# EAGLE board Esp_4relay_feedback (EAGLE 6.1)
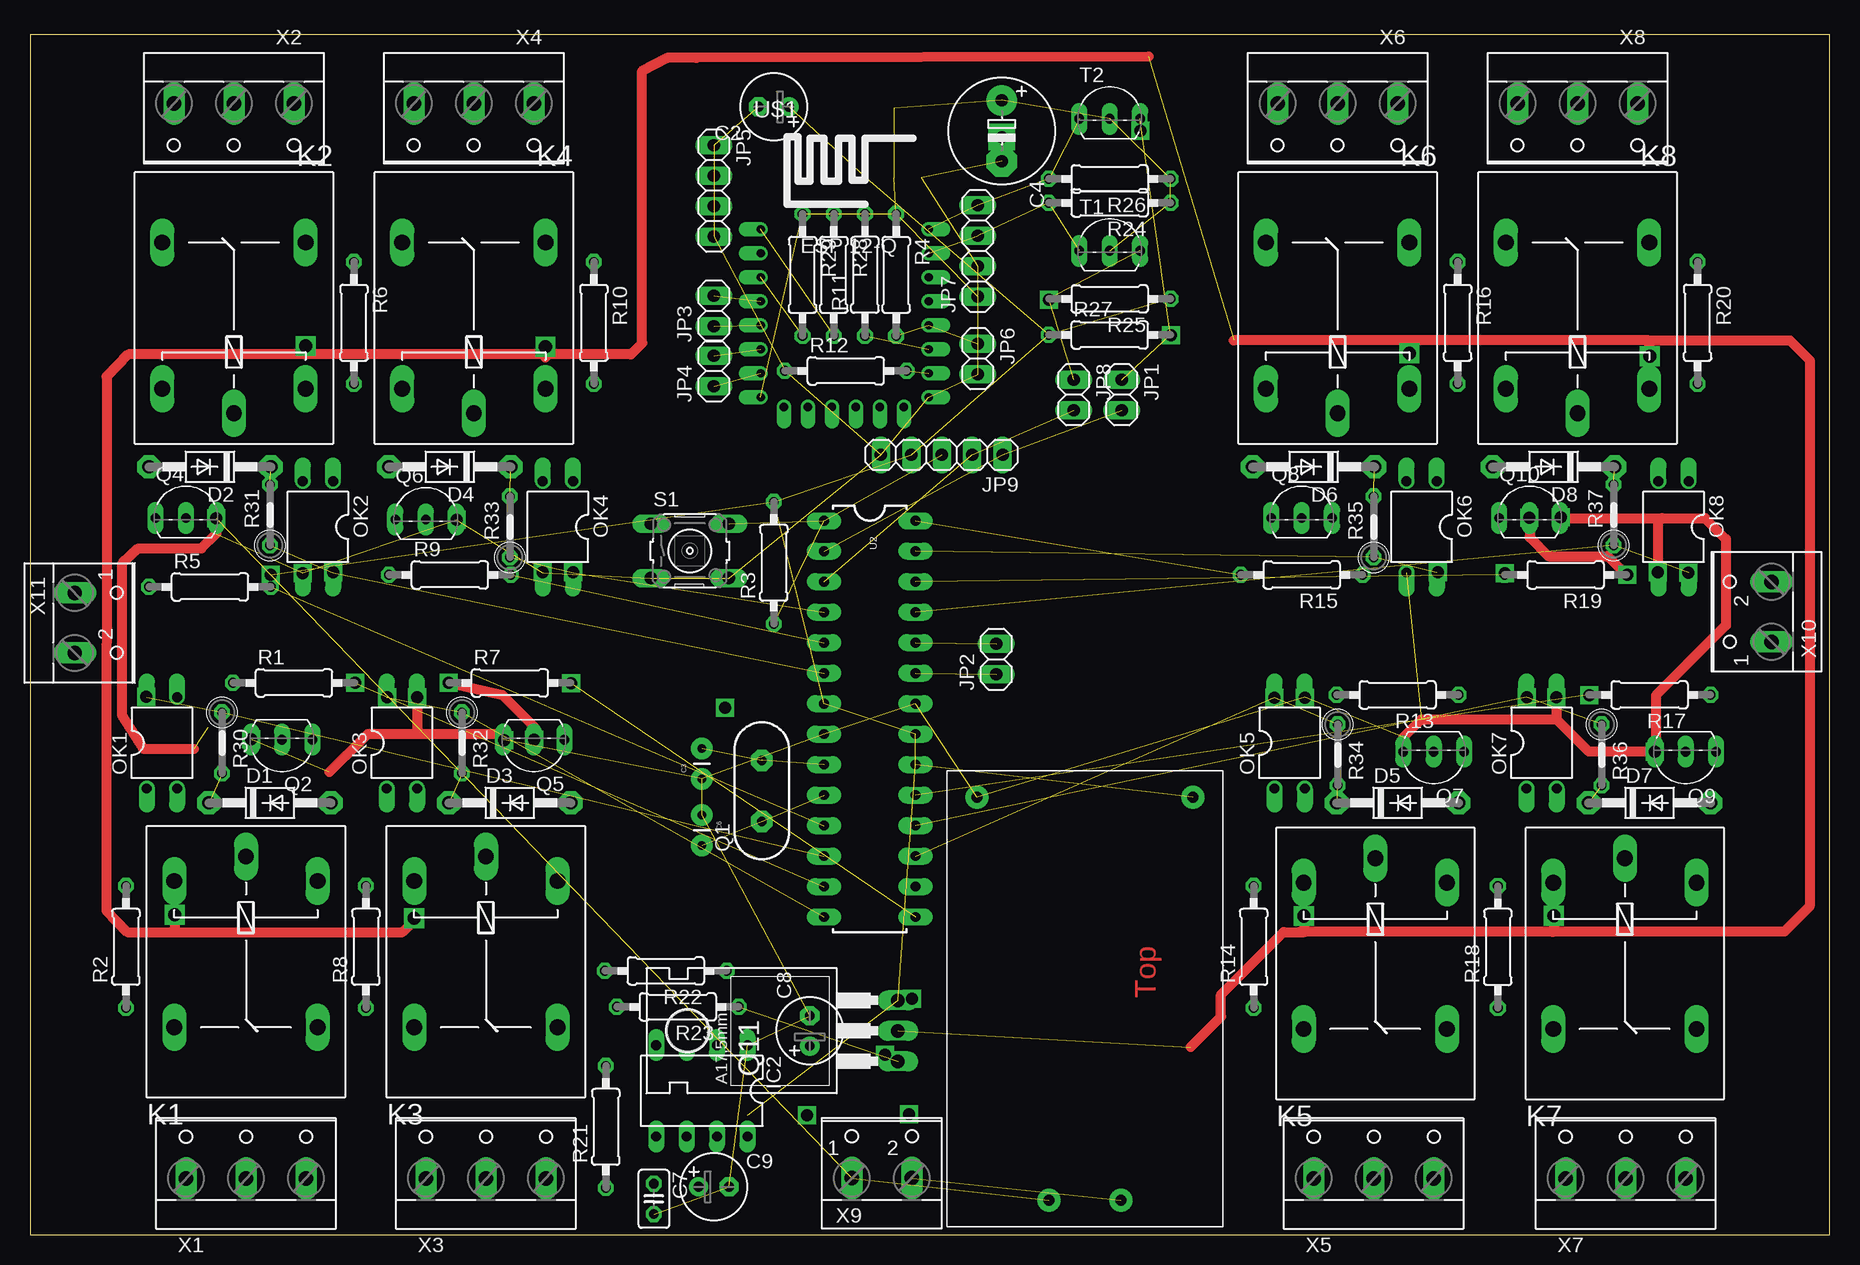
[diagram p0: board, top side]
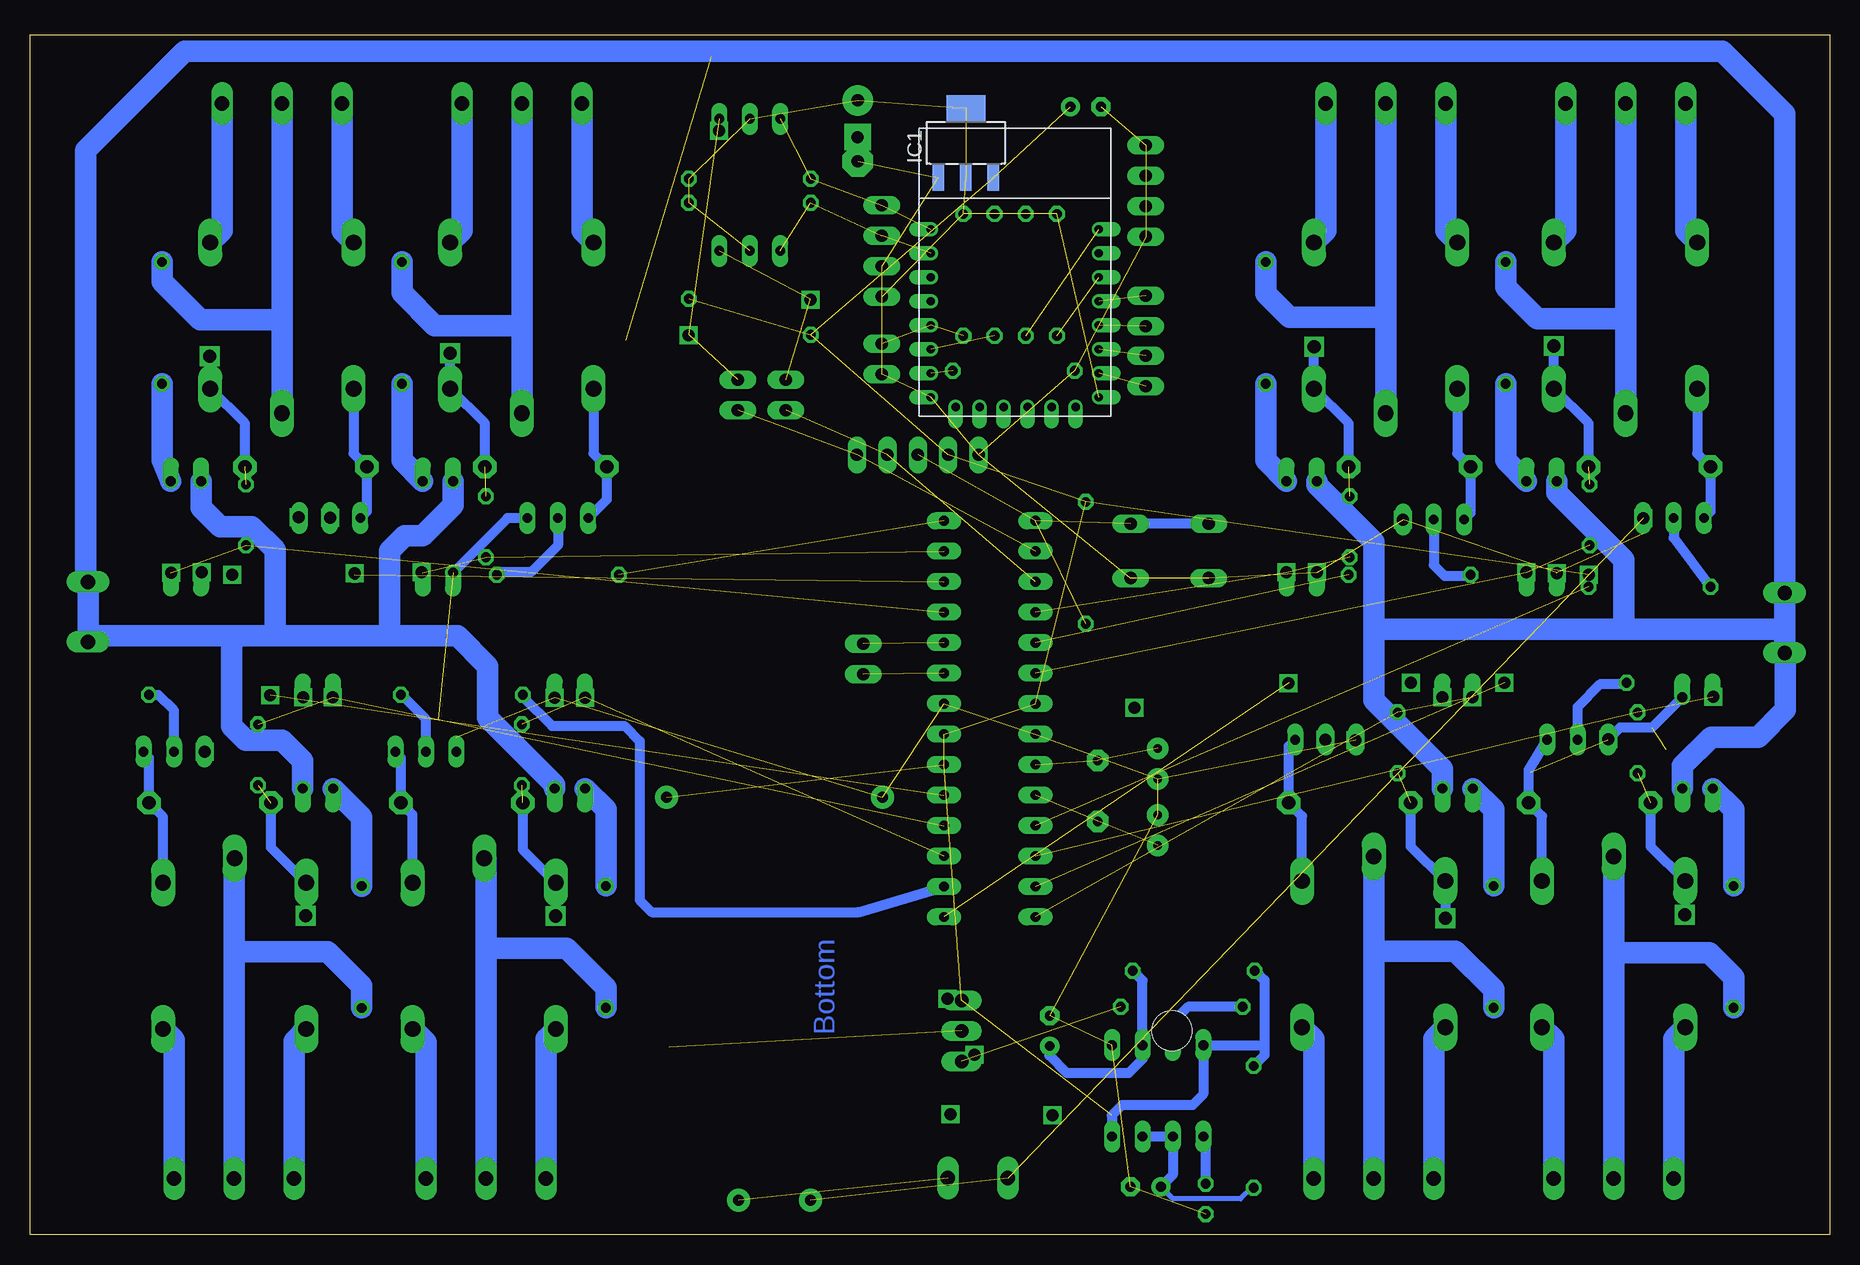
[diagram p1: board, bottom side, seen from below]

Size 150 x 100 mm. Coordinates in mm from the lower left corner, seen from the top.
Outline: 0,0 150,0 150,100 0,100 0,0
Copper layers (1*16): Top 0.035mm / dielectric 1.5mm / Bottom 0.035mm
Design rules: minimum track width 30mil, minimum drill 24mil, track to track 18mil, track to pad 18mil, pad to pad 18mil, via to via 18mil, smd to smd 8mil, copper to edge 20mil, drill to drill 15mil, minimum pad ring 10mil, minimum via ring 8mil, stop-mask expansion 4mil, vias tented up to drill 0mil, thermal gap 10mil

## Footprints (pad centres in the part's own frame; a part is rotated, then mirrored left to right if it is on the bottom)
E2,5-6 = drill 0.813 pad 1.6: + -1.27,0 | drill 0.813 pad 1.6 octagon: - 1.27,0
CAP-PTH-SMALL = drill 0.7 pad 1.778: 1 0,0; 2 2.54,0
E5-8,5 = drill 1.016 pad 2.54: + -2.54,0 | drill 1.016 pad 2.54 octagon: - 2.54,0
C025-025X050 = drill 0.813 octagon: 1 -1.27,0; 2 1.27,0
DO41-10 = drill 1.1 pad 1.93 octagon: A 5.08,0; C -5.08,0
SOT223 = smd 0.95 x 2.15: 1 -2.3,-2.9; 2 0,-2.9; 3 2.3,-2.9 | smd 3.25 x 2.15: 4 0,2.9
DIL-08 = drill 0.813 long: 1 -3.81,-3.81; 2 -1.27,-3.81; 3 1.27,-3.81; 4 3.81,-3.81; 5 3.81,3.81; 6 1.27,3.81; 7 -1.27,3.81; 8 -3.81,3.81
1X02 = drill 1.016 long: 1 -1.27,0; 2 1.27,0
1X04 = drill 1.016 long: 1 -3.81,0; 2 -1.27,0; 3 1.27,0; 4 3.81,0
1X05 = drill 1.016 long: 1 -5.08,0; 2 -2.54,0; 3 0,0; 4 2.54,0; 5 5.08,0
G5LE = drill 1.321 long: 1 -7.493,-5.969; 2 -7.493,5.969; O 4.699,5.969; P -9.525,0; S 4.699,-5.969
DIL04 = drill 0.813 offset: 1 -1.27,-3.81; 2 1.27,-3.81; 3 1.27,3.81; 4 -1.27,3.81
HC49US = drill 0.8 pad 1.778 octagon: 1 -2.54,0; 2 2.54,0
TO92-EBC = drill 0.813 long: B 0,-1.27; C -2.54,-1.27; E 2.54,-1.27
TO220AH = drill 1.118 long: B -2.54,-6.35; C 0,-6.35; E 2.54,-6.35 | hole 3.302: 0,11.176
0207/10 = drill 0.813 octagon: 1 -5.08,0; 2 5.08,0
0207/5V = drill 0.813 octagon: 1 -2.54,0; 2 2.54,0
B3F-10XX = drill 1.016 long: 1 -3.251,2.261; 2 3.251,2.261; 3 -3.251,-2.261; 4 3.251,-2.261
TO92-CBE = drill 0.813 long: B 0,0; C -2.54,0; E 2.54,0
DIL28-3 = drill 0.813 pad 1.422 long: 1 -16.51,-3.81; 2 -13.97,-3.81; 3 -11.43,-3.81; 4 -8.89,-3.81; 5 -6.35,-3.81; 6 -3.81,-3.81; 7 -1.27,-3.81; 8 1.27,-3.81; 9 3.81,-3.81; 10 6.35,-3.81; 11 8.89,-3.81; 12 11.43,-3.81; 13 13.97,-3.81; 14 16.51,-3.81; 15 16.51,3.81; 16 13.97,3.81; 17 11.43,3.81; 18 8.89,3.81; 19 6.35,3.81; 20 3.81,3.81; 21 1.27,3.81; 22 -1.27,3.81; 23 -3.81,3.81; 24 -6.35,3.81; 25 -8.89,3.81; 26 -11.43,3.81; 27 -13.97,3.81; 28 -16.51,3.81
ESP12Q = drill 0.7 offset: ADC -7.1,3.8; CH_PD -7.1,1.8; CS0 -5.165,-9.005; GND 6.9,-8.2; GPIO0 6.9,-2.2; GPIO2 6.9,-4.2; GPIO4 6.9,1.8; GPIO5 6.9,-0.2; GPIO9 -1.165,-9.005; GPIO10 0.835,-9.005; GPIO12 -7.1,-4.2; GPIO13 -7.1,-6.2; GPIO14 -7.1,-2.2; GPIO15 6.9,-6.2; GPIO16 -7.1,-0.2; MISO -3.165,-9.005; MOSI 2.835,-9.005; RESET -7.1,5.8; RX 6.9,3.8; SCLK 4.835,-9.005; TX 6.9,5.8; VCC -7.1,-8.2
AMIT_HIGH_LINK = drill 0.9 pad 1.93: AC1 -18.12,3.07; AC2 -18.12,-2.93; GND 15.48,9.07; VCC 15.48,-8.93
W237-103 = drill 1.194 long: 1 -5,-1.29; 2 0,-1.29; 3 5,-1.29
W237-102 = drill 1.194 long: 1 -2.5,-1.27; 2 2.5,-1.27

## Placement (x,y rotation side)
C2  10uF  [E2,5-6]  62,94 180 top
C3  22pF  [CAP-PTH-SMALL]  56,38 90 top
C4  470uF  [E5-8,5]  81,92 270 top
C6  22pF  [CAP-PTH-SMALL]  56,35 270 top
C7  0.01uf  [C025-025X050]  52,3 270 top
C8  10uf  [E2,5-6]  65,17 90 top
C9  100uf  [E2,5-6]  57,4 0 top
D1  1N4007  [DO41-10]  20,36 0 top
D2  1N4007  [DO41-10]  15,64 180 top
D3  1N4007  [DO41-10]  40,36 0 top
D4  1N4007  [DO41-10]  35,64 180 top
D5  1N4007  [DO41-10]  114,36 0 top
D6  1N4007  [DO41-10]  107,64 180 top
D7  1N4007  [DO41-10]  135,36 0 top
D8  1N4007  [DO41-10]  127,64 180 top
IC1  LM1117MP-3.3  [SOT223]  72,91 0 bottom
IC2  NE555  [DIL-08]  56,12 180 top
JP1  [1X02]  91,70 270 top
JP2  [1X02]  80.55,47.99 90 top
JP3  [1X02]  57,77 90 top
JP4  [1X02]  57,72 90 top
JP5  [1X04]  57,87 270 top
JP6  [1X02]  79,73 270 top
JP7  [1X04]  79,82 90 top
JP8  [1X02]  87,70 270 top
JP9  [1X05]  76,65 180 top
K1  G5LE  [G5LE]  18,22 270 top
K2  G5LE  [G5LE]  17,78 90 top
K3  G5LE  [G5LE]  38,22 270 top
K4  G5LE  [G5LE]  37,78 90 top
K5  G5LE  [G5LE]  112.14,21.86 270 top
K6  G5LE  [G5LE]  109,78 90 top
K7  G5LE  [G5LE]  132.95,21.86 270 top
K8  G5LE  [G5LE]  129,78 90 top
OK1  PC817  [DIL04]  11,41 0 top
OK2  PC817  [DIL04]  24,59 180 top
OK3  PC817  [DIL04]  31,41 0 top
OK4  PC817  [DIL04]  44,59 180 top
OK5  PC817  [DIL04]  105,41 0 top
OK6  PC817  [DIL04]  116,59 180 top
OK7  PC817  [DIL04]  126,41 0 top
OK8  PC817  [DIL04]  137,59 180 top
Q1  16MHz  [HC49US]  61,37 90 top
Q2  BC547  [TO92-EBC]  21,40 180 top
Q4  BC547  [TO92-EBC]  13,61 0 top
Q5  BC547  [TO92-EBC]  42,40 180 top
Q6  BC547  [TO92-EBC]  32.99,60.88 0 top
Q7  BC547  [TO92-EBC]  117,39 180 top
Q8  BC547  [TO92-EBC]  106,61 0 top
Q9  BC547  [TO92-EBC]  138,39 180 top
Q10  BC547  [TO92-EBC]  125,61 0 top
Q11  TIP120  [TO220AH]  66,17 90 top
R1  1k  [0207/10]  22,46 0 top
R2  220k  [0207/10]  8,24 90 top
R3  10k  [0207/10]  62,56 90 top
R4  10k  [0207/10]  72.2,80 270 top
R5  1k  [0207/10]  15,54 0 top
R6  220k  [0207/10]  27,76 270 top
R7  1k  [0207/10]  40,46 0 top
R8  220k  [0207/10]  28,24 90 top
R9  1k  [0207/10]  35,55 0 top
R10  220k  [0207/10]  47,76 270 top
R11  10k  [0207/10]  69.6,80 90 top
R12  10k  [0207/10]  68,72 0 top
R13  1k  [0207/10]  114,45 180 top
R14  220k  [0207/10]  102,24 90 top
R15  1k  [0207/10]  106,55 180 top
R16  220k  [0207/10]  119,76 270 top
R17  1k  [0207/10]  135,45 180 top
R18  220k  [0207/10]  122.35,23.99 90 top
R19  1k  [0207/10]  128,55 180 top
R20  220k  [0207/10]  139,76 270 top
R21  47k  [0207/10]  48,9 90 top
R22  1k  [0207/10]  53,22 180 top
R23  1k  [0207/10]  54,19 180 top
R24  10k  [0207/10]  90,86 180 top
R25  10k  [0207/10]  90,78 180 top
R26  10k  [0207/10]  90,88 180 top
R27  10k  [0207/10]  90,75 0 top
R28  10k  [0207/10]  67,80 270 top
R29  10k  [0207/10]  64.4,80 270 top
R30  10k  [0207/5V]  16,41 270 top
R31  10k  [0207/5V]  20,60 90 top
R32  10k  [0207/5V]  36,41 270 top
R33  10k  [0207/5V]  40,59 90 top
R34  10k  [0207/5V]  109,40 270 top
R35  10k  [0207/5V]  112,59 90 top
R36  10k  [0207/5V]  131,40 270 top
R37  10k  [0207/5V]  132,60 90 top
S1  [B3F-10XX]  55,57 0 top
T1  2N7000  [TO92-CBE]  90,82 0 top
T2  2N7000  [TO92-CBE]  90,93 0 top
U2  ATMEGA328P_PDIP  [DIL28-3]  70,43 270 top
U$1  ESP12Q  [ESP12Q]  68,78 0 top
U$2  AMIT_HIGH_LINK  [AMIT_HIGH_LINK]  88,21 90 top
X1  [W237-103]  18,6 0 top
X2  [W237-103]  17,93 180 top
X3  [W237-103]  38,6 0 top
X4  [W237-103]  37,93 180 top
X5  [W237-103]  112,6 0 top
X6  [W237-103]  109,93 180 top
X7  [W237-103]  133,6 0 top
X8  [W237-103]  129,93 180 top
X9  [W237-102]  71,6 0 top
X10  [W237-102]  143.89,51.92 90 top
X11  [W237-102]  5,51 270 top

## Library data of the parts
C2 C4 C7-C9 R1 R2 R4-R29 = rcl
C3 C6 Q1 = SparkFun
D1-D8 = diode
IC1 = lm1117_10; MF: Texas Instruments; MPN: LM1117MP-3.3; OC_FARNELL: 9778195; OC_NEWARK: 28X3416
IC2 = st-microelectronics; MF: Arrow Electronics; MPN: NE555N; OC_FARNELL: 1467742; OC_NEWARK: 89K1486
JP1-JP9 = pinhead
K1-K8 = relay; OC_FARNELL: unknown; OC_NEWARK: unknown
OK1-OK8 = optocoupler; MPN: PC817X4J000F; OC_FARNELL: 9707727; OC_NEWARK: 97K7059
Q2 Q4-Q10 = transistor-npn
Q11 = transistor-power
R3 = resistor
R30-R37 = amit_rcl
S1 = switch-omron; MPN: B3F-1000; OC_FARNELL: 176432; OC_NEWARK: 36M3542
T1 T2 = transistor
U2 = SparkFun-DigitalIC
U$1 = esp826612q
U$2 = amit_high_link_5W
X1-X8 = con-wago-500; MPN: 237-103; OC_FARNELL: unknown; OC_NEWARK: 18M7116
X9-X11 = amit_screw_terminal_23; MPN: 237-102; OC_FARNELL: unknown; OC_NEWARK: 70K9898

## Nets
3V3: C4.+ IC1.2 IC1.4 JP7.1 R4.1 R11.2 R24.1 R26.1 R28.1 R29.1 T1.B T2.B U$1.VCC
ERT: JP2.1 U2.23
F1: OK1.4 R30.1 U2.12
F2: OK2.4 R31.1 U2.6
F3: OK3.4 R32.1 U2.14
F4: OK4.4 R33.1 U2.4
F5: OK5.4 R34.1 U2.17
F6: OK6.4 R35.1 U2.27
F7: OK7.4 R36.1 U2.18
F8: OK8.4 R37.1 U2.25
GND: C2.- C3.1 C4.- C6.1 C7.2 C8.- C9.- IC1.1 IC2.1 JP5.1 JP5.2 JP5.3 JP5.4 JP6.2 JP7.2 JP9.5 OK1.3 OK2.3 OK3.3 OK4.3 OK5.3 OK6.3 OK7.3 OK8.3 Q2.E Q4.E Q5.E Q6.E Q7.E Q8.E Q9.E Q10.E R12.1 S1.3 S1.4 U2.8 U2.22 U$1.GND U$2.GND
IO0: JP6.1 R4.2 U$1.GPIO0
IO15: R12.2 U$1.GPIO15
LINE: OK1.2 OK2.2 OK3.2 OK4.2 OK5.2 OK6.2 OK7.2 OK8.2 X10.1 X10.2 X11.1 X11.2
N$1: K1.P R2.1 X1.2
N$2: OK1.1 R2.2
N$3: K1.S X1.1
N$4: K2.P R6.1 X2.2
N$5: C3.2 Q1.2 U2.9
N$6: K2.S X2.1
N$7: Q2.B R1.1
N$8: D1.A K1.2 Q2.C
N$9: Q4.B R5.1
N$10: C6.2 Q1.1 U2.10
N$11: D2.A K2.2 Q4.C
N$12: K2.O X2.3
N$13: OK2.1 R6.2
N$14: K3.P R8.1 X3.2
N$15: K3.S X3.1
N$16: Q5.B R7.1
N$17: D3.A K3.2 Q5.C
N$18: K3.O X3.3
N$19: OK3.1 R8.2
N$20: K4.P R10.1 X4.2
N$21: R11.1 U$1.GPIO2
N$22: K4.S X4.1
N$23: JP1.1 R27.2 T2.E
N$24: Q6.B R9.1
N$25: D4.A K4.2 Q6.C
N$26: C9.+ IC2.6 IC2.7 R21.1
N$27: JP8.1 R25.2 T1.E
N$28: K1.O X1.3
N$29: K4.O X4.3
N$30: OK4.1 R10.2
N$31: K5.P R14.1 X5.2
N$32: K5.S X5.1
N$33: Q7.B R13.1
N$34: D5.A K5.2 Q7.C
N$35: K5.O X5.3
N$36: C8.+ IC2.2 R22.1
N$37: C7.1 IC2.5
N$38: IC2.3 R23.2
N$39: Q11.B R23.1
N$40: R29.2 U$1.CH_PD
N$41: R28.2 U$1.RESET
N$42: OK5.1 R14.2
N$43: K6.P R16.1 X6.2
N$44: K6.S X6.1
N$45: Q8.B R15.1
N$46: D6.A K6.2 Q8.C
N$47: K6.O X6.3
N$48: OK6.1 R16.2
N$49: K7.P R18.1 X7.2
N$50: K7.S X7.1
N$51: Q9.B R17.1
N$52: D7.A K7.2 Q9.C
N$53: K7.O X7.3
N$54: OK7.1 R18.2
N$55: K8.P R20.1 X8.2
N$56: K8.S X8.1
N$57: Q10.B R19.1
N$58: D8.A K8.2 Q10.C
N$59: K8.O X8.3
N$60: OK8.1 R20.2
N$61: U$2.AC1 X9.1
N$62: JP3.1 U$1.GPIO14
N$63: JP3.2 U$1.GPIO16
N$64: JP4.1 U$1.GPIO13
N$65: JP4.2 U$1.GPIO12
N$66: U$2.AC2 X9.2
R1: R1.2 U2.13
R2: R5.2 U2.11
R3: R7.2 U2.15
R4: R9.2 U2.5
R5: R13.2 U2.16
R6: R15.2 U2.28
R7: R17.2 U2.19
R8: R19.2 U2.26
RELAY_SUPPLY: D1.C D2.C D3.C D4.C D5.C D6.C D7.C D8.C K1.1 K2.1 K3.1 K4.1 K5.1 K6.1 K7.1 K8.1 Q11.C R30.2 R31.2 R32.2 R33.2 R34.2 R35.2 R36.2 R37.2
RESET: JP9.3 R3.1 S1.1 S1.2 U2.1
RX: JP1.2 JP9.1 U2.2
RX1: JP7.3 R24.2 T1.C U$1.RX
TX: JP8.2 JP9.2 U2.3
TX1: JP7.4 R26.2 T2.C U$1.TX
VCC1: C2.+ IC1.3 IC2.4 IC2.8 JP9.4 Q11.E R3.2 R21.2 R22.2 R25.1 R27.1 U2.7 U2.20 U2.21 U$2.VCC
WE: JP2.2 U2.24

## Tracks (layer width: path | path; a pad name or v marks a point on that pad's centre or on a via)
3V3  (12 unrouted)
ERT  (1 unrouted)
F1  (2 unrouted)
F2  (2 unrouted)
F3  (2 unrouted)
F4  (2 unrouted)
F5  (2 unrouted)
F6  (2 unrouted)
F7  (2 unrouted)
F8  (2 unrouted)
GND  (via drill 1 pad 1.02)  (32 unrouted)
  Top 0.813: 127.29,42.93 129.95,40.27 Q9.E 135.52,40.33 135.52,44.96 141.36,50.8 141.36,57.99 139.62,59.73 136.03,59.73 | 127.29,42.93 127.29,44.79 OK7.3 | Q7.E 114.46,41.45 115.96,42.95 127.27,42.95 127.29,42.93 | Q10.E 136.03,59.73 | OK8.3 135.73,59.43 136.03,59.73 | 24.95,38.56 26.35,39.95 26.38,39.95 28.18,41.76 32.6,41.76 | Q4.E 15.55,59.74 15.68,59.74 15.53,59.59 15.53,58.45 14.29,57.2 9.03,57.2 7.71,55.96 7.71,43.26 9.49,40.49 13.65,40.49 | 32.6,41.76 38.97,41.76 Q5.E | OK3.3 32.27,42.09 32.6,41.76
  Bottom 0.813: OK1.3 14.81,42.27 17.46,42.27 Q2.E | Q8.E 110.19,59.73 OK6.3
  other vias: 32.27,44.81 22.72,55.14
IO0  (2 unrouted)
IO15  (1 unrouted)
LINE
  Bottom 1.778: OK5.2 106.27,37.53 111.85,43.1 111.85,47.4 114.36,49.91 119.98,49.91 | 119.98,49.91 129.7,49.91 | 129.7,49.91 133.34,49.91 | 133.34,49.91 144.79,49.91 | 144.79,49.91 144.84,49.91 144.94,50.01 | OK6.2 114.73,60.82 117.28,58.27 118.78,58.27 120.03,57.02 120.03,49.96 119.98,49.91 | OK8.2 135.73,60.61 134.15,59.03 131.51,59.03 129.58,57.1 129.58,50.04 129.7,49.91 | OK7.2 127.27,39.53 128.97,41.22 132.04,41.22 133.18,42.37 133.18,49.28 133.08,49.38 133.08,49.66 133.34,49.91 | OK4.2 42.73,62.53 37.96,57.76 37.96,50.22 | 37.96,50.22 37.96,44.55 32.27,38.86 OK3.2 | 16.88,50.47 4.33,50.47 4.28,50.42 3.81,50.42 3.73,50.34 | 16.88,50.47 37.71,50.47 37.96,50.22 | OK1.2 12.27,39.08 9.87,41.48 5.96,41.48 3.67,43.76 3.67,48.44 X11.2 3.73,50.34 | OK2.2 22.73,61.83 17.16,56.26 17.16,50.75 16.88,50.47 | 145.55,54.53 145.35,54.74 145.35,90.4 137.12,98.63 8.93,98.63 3.73,93.43 X11.1 3.73,50.34 | 145.55,54.53 145.15,54.53 145.16,54.52 X10.2 X10.1 145.16,49.54 144.79,49.91 | 145.55,54.53 145.76,54.33
N$1
  Bottom 1.778: K1.P 18,24.03 | 18,24.03 X1.2 | R2.1 8,21.46 10.04,23.5 17.47,23.5 18,24.03
N$2
  Bottom 1.778: R2.2 8,35.46 OK1.1
N$3
  Bottom 1.778: X1.1 13,16.33 K1.S
N$4
  Bottom 1.778: X2.2 17,76.71 | 17,76.71 K2.P | R6.1 27,78.96 24.36,76.33 17.38,76.33 17,76.71
N$5  (2 unrouted)
N$6
  Bottom 1.778: X2.1 22,83.67 K2.S
N$7
  Bottom 0.813: Q2.B 21,44 19.09,45.91 17.01,45.91 R1.1
N$8
  Bottom 0.813: K1.2 23.97,34.89 D1.A 25.08,38.73 Q2.C
N$9
  Bottom 0.813: Q4.B 13,58.08 R5.1
N$10  (2 unrouted)
N$11
  Bottom 0.813: K2.2 11.03,65.11 D2.A 9.92,60.27 Q4.C
N$12
  Bottom 1.778: X2.3 12,83.67 K2.O
N$13
  Bottom 1.778: R6.2 27,64.54 OK2.1
N$14
  Bottom 1.778: X3.2 38,23.88 | 38,23.88 K3.P | R8.1 28,20.45 31.17,23.62 37.75,23.62 38,23.88
N$15
  Bottom 1.778: X3.1 33,16.33 K3.S
N$16
  Top 0.813: R7.1 39.37,45 42,42.37 Q5.B
N$17
  Bottom 0.813: K3.2 43.97,34.89 D3.A 45.08,40.73 Q5.C
N$18
  Bottom 1.778: X3.3 43,16.33 K3.O
N$19
  Bottom 1.778: R8.2 28,35.46 OK3.1
N$20
  Bottom 1.778: X4.2 37,76.63 | 37,76.63 K4.P | R10.1 47,78.44 45.04,76.48 37.15,76.48 37,76.63
N$21  (1 unrouted)
N$22
  Bottom 1.778: X4.1 42,83.67 K4.S
N$23  (2 unrouted)
N$24
  Bottom 0.813: Q6.B 32.99,55.82 32.09,54.91 30,54.91 R9.1
N$25
  Bottom 0.813: K4.2 31.03,65.11 D4.A 29.92,60.14 Q6.C
N$26
  Bottom 0.406: R21.1 48.16,3.92 49.09,3 54.73,3 C9.+
  Bottom 0.813: C9.+ 54.73,5 IC2.6 IC2.7
N$27  (2 unrouted)
N$28
  Bottom 1.778: X1.3 23,16.33 K1.O
N$29
  Bottom 1.778: X4.3 32,83.67 K4.O
N$30
  Bottom 1.778: R10.2 47,64.54 OK4.1
N$31
  Bottom 1.778: X5.2 112,23.77 | 112,23.77 112,31.25 K5.P | R14.1 102,20.61 105.26,23.88 111.9,23.88 112,23.77
N$32
  Bottom 1.778: X5.1 107,16.33 K5.S
N$33
  Bottom 0.813: Q7.B 117,42.96 118.95,44.91 118.99,44.91 R13.1
N$34
  Bottom 0.813: Q7.C 119.08,39.73 D5.A 118.11,35.03 K5.2
N$35
  Bottom 1.778: X5.3 117,16.05 K5.O
N$36
  Bottom 0.813: R22.1 57.27,21.19 IC2.2 57.27,14.65 58.43,13.49 63.56,13.49 65.04,14.96 65.04,15.69 C8.+
N$37
  Bottom 0.813: C7.1 52,8 IC2.5
N$38
  Bottom 0.813: R23.2 53.48,19 54.72,17.75 IC2.3
N$39  (1 unrouted)
N$40  (1 unrouted)
N$41  (1 unrouted)
N$42
  Bottom 1.778: R14.2 102,35.46 OK5.1
N$43
  Bottom 1.778: X6.2 109,75.89 | 109,75.89 K6.P | R16.1 119,78.51 116.26,75.77 109.13,75.77 109,75.89
N$44
  Bottom 1.778: X6.1 114,83.67 K6.S
N$45
  Bottom 0.813: Q8.B 106,57.45 108.24,55.22 110.86,55.22 R15.1
N$46
  Bottom 0.813: K6.2 103.03,65.11 D6.A 101.92,61.27 Q8.C
N$47
  Bottom 1.778: X6.3 104,83.67 K6.O
N$48
  Bottom 1.778: R16.2 119,64.54 OK6.1
N$49
  Bottom 1.778: X7.2 133,23.77 | 133,23.77 133,31.33 K7.P | R18.1 122.35,20.75 125.2,23.6 132.82,23.6 133,23.77
N$50
  Bottom 1.778: X7.1 128,16.14 K7.S
N$51
  Bottom 0.813: Q9.B 138,43.7 139.3,45 R17.1
N$52
  Bottom 0.813: K7.2 138.91,34.83 D7.A 140.08,39.73 Q9.C
N$53
  Bottom 1.778: X7.3 138,16.25 K7.O
N$54
  Bottom 1.778: R18.2 122.35,34.81 OK7.1
N$55
  Bottom 1.778: X8.2 129,76.43 | 129,76.43 K8.P | R20.1 139,79.43 135.82,76.25 129.18,76.25 129,76.43
N$56
  Bottom 1.778: X8.1 134,83.67 K8.S
N$57
  Top 0.813: Q10.B 125,58.12 126.56,56.57 131.51,56.57 R19.1
N$58
  Bottom 0.813: K8.2 123.03,65.11 D8.A 121.92,60.27 Q10.C
N$59
  Bottom 1.778: X8.3 124,83.67 K8.O
N$60
  Bottom 1.778: R20.2 139,64.54 OK8.1
N$61  (via drill 1 pad 1.02)  (2 unrouted)
  other vias: 15.53,59.72
N$62  (1 unrouted)
N$63  (1 unrouted)
N$64  (1 unrouted)
N$65  (1 unrouted)
N$66  (1 unrouted)
N$69  (via drill 1 pad 1.02)
  other vias: 25.26,55.22
N$70  (via drill 1 pad 1.02)
  other vias: 35.57,59.59
N$71  (via drill 1 pad 1.02)
  other vias: 42.73,55.22
N$72  (via drill 1 pad 1.02)
  other vias: 45.27,55.22
N$73  (via drill 1 pad 1.02)
  other vias: 9.69,44.86
N$74  (via drill 1 pad 1.02)
  other vias: 18.44,41.3
N$75  (via drill 1 pad 1.02)
  other vias: 27.11,46.01
N$76  (via drill 1 pad 1.02)
  other vias: 34.91,46.01
N$77  (via drill 1 pad 1.02)
  other vias: 29.76,44.81
N$78  (via drill 1 pad 1.02)
  other vias: 45.1,45.96
N$79  (via drill 1 pad 1.02)
  other vias: 42.02,41.25
N$80  (via drill 1 pad 1.02)
  other vias: 39.51,41.22
N$81  (via drill 1 pad 1.02)
  other vias: 64.76,9.98
N$82  (via drill 1 pad 1.02)
  other vias: 73.27,10.03
N$83  (via drill 1 pad 1.02)
  other vias: 71.25,15.01
N$84  (via drill 1 pad 1.02)
  other vias: 57.94,43.94
N$87  (via drill 1 pad 1.02)
  other vias: 84.93,77.95
N$88  (via drill 1 pad 1.02)
  other vias: 95.09,74.97
N$89  (via drill 1 pad 1.02)
  other vias: 92.58,91.99
N$90  (via drill 1 pad 2.18)
  other vias: 81.01,91.49
N$91  (via drill 1 pad 1.42)
  other vias: 124.98,59.74
N$92  (via drill 1 pad 1.42)
  other vias: 127.6,59.79
N$93  (via drill 1 pad 1.42)
  other vias: 122.95,55.12
N$94  (via drill 1 pad 1.42)
  other vias: 117.33,55.22
N$95  (via drill 1 pad 1.42)
  other vias: 133.16,55.02
N$96  (via drill 1 pad 1.42)
  other vias: 135.7,55.22
N$97  (via drill 1 pad 1.42)
  other vias: 138.21,55.17
N$98  (via drill 1 pad 1.42)
  other vias: 103.72,44.75
N$99  (via drill 1 pad 1.42)
  other vias: 106.29,44.75
N$100  (via drill 1 pad 1.42)
  other vias: 124.75,44.81
N$101  (via drill 1 pad 1.42)
  other vias: 127.24,44.81
N$102  (via drill 1 pad 1.42)
  other vias: 129.96,44.96
N$103  (via drill 1 pad 1.42)
  other vias: 135.44,40.26
N$104  (via drill 1 pad 1.42)
  other vias: 73.54,19.67
R1  (1 unrouted)
R2  (1 unrouted)
R3  (1 unrouted)
R4  (1 unrouted)
R5
  Bottom 0.813: R13.2 108.92,44.85 106.49,42.42 100.44,42.42 99.17,41.15 99.17,27.89 98.18,26.9 80.94,26.9 U2.16
R6  (1 unrouted)
R7  (1 unrouted)
R8  (1 unrouted)
RELAY_SUPPLY  (via drill 1.1)  (10 unrouted)
  Top 0.813: 96.74,15.65 99.28,18.19 99.28,20.02 104.48,25.22 105.8,25.22 | 105.8,25.22 106.18,25.22 106.17,25.23 | 134.94,74.55 115,74.55 | 115,74.55 100.34,74.55 | 93.23,98.18 55.53,98.08 53.12,98.08 51.04,97 51.04,74.32 50.1,73.38 43.22,73.38 | 43.22,73.38 42.94,73.38 | 42.94,73.38 23,73.38 | 23,73.38 8.19,73.38 6.39,71.53 6.36,27.05 8.11,25.22 12.2,25.22 | 12.2,25.22 31.05,25.22 32.02,26.19 v32.02,26.39 | 22.97,73.35 23,73.38 | 42.97,73.13 43.22,73.38 | 12.2,25.22 12.03,25.39 12.05,25.42 v12.05,26.67 | 134.97,74.52 134.94,74.55 | 115,74.55 114.97,74.52 v114.97,73.46 | 134.94,74.55 135.09,74.55 | 135.09,74.55 146.7,74.55 148.35,72.9 148.35,27.38 146.24,25.27 127.19,25.27 127.01,25.45 | 127.01,25.45 126.94,25.25 | 126.94,25.25 106.24,25.25 | 106.24,25.25 105.8,25.22 | 126.98,25.47 126.94,25.25 | v22.97,74.07 22.97,73.41 23,73.38 | v42.96,74.02 42.96,73.41 42.94,73.38 | v135.01,73.23 135.01,74.22 134.94,74.3 134.94,74.32 135.09,74.47 135.09,74.55 | v127.01,26.59 127.01,25.45 | v106.18,26.57 106.18,25.3 106.24,25.25
  Bottom 0.813: D2.C 20.08,67.62 K2.1 v22.97,74.06 v22.97,74.07 | D4.C 40.08,67.62 K4.1 v42.97,74.01 v42.96,74.02 | D1.C 14.92,32.38 K1.1 12.03,26.69 v12.05,26.67 | D3.C 34.92,32.38 K3.1 32.03,26.41 v32.02,26.39 | D6.C 112.08,67.62 K6.1 v114.97,73.45 v114.97,73.46 | D8.C 132.08,67.62 K8.1 134.97,73.18 v135.01,73.23 | D5.C 108.92,32.1 K5.1 v106.17,26.58 v106.18,26.57 | D7.C 129.92,32.3 K7.1 126.98,26.63 v127.01,26.59
RESET  (3 unrouted)
  Bottom 0.813: S1.1 S1.2
RX  (2 unrouted)
RX1  (3 unrouted)
TX  (2 unrouted)
TX1  (3 unrouted)
VCC1  (via drill 1 pad 1.02)  (12 unrouted)
  Bottom 0.813: R22.2 47.87,22 47.1,21.23 47.1,15.88 | 47.1,15.88 47.21,15.77 52.15,15.77 IC2.4 52.19,11.73 53.1,10.82 58.97,10.82 59.83,9.96 59.83,8.21 IC2.8 | 47.1,15.88 47.1,14.98 R21.2
  other vias: 20.05,54.99
WE  (1 unrouted)

## Text on the board
Top: Top
Bottom: Bottom